# Altium PCB 新主控制.PcbDoc (part 2 of 3)
Units mil, origin at the board's own origin, x right, y up, seen from the top; angles counter-clockwise.
Board outline 9070 x 4900 mil, 2 copper layers (Top Layer, Bottom Layer); 275 components, 202 nets, 862 pads, 116 vias.
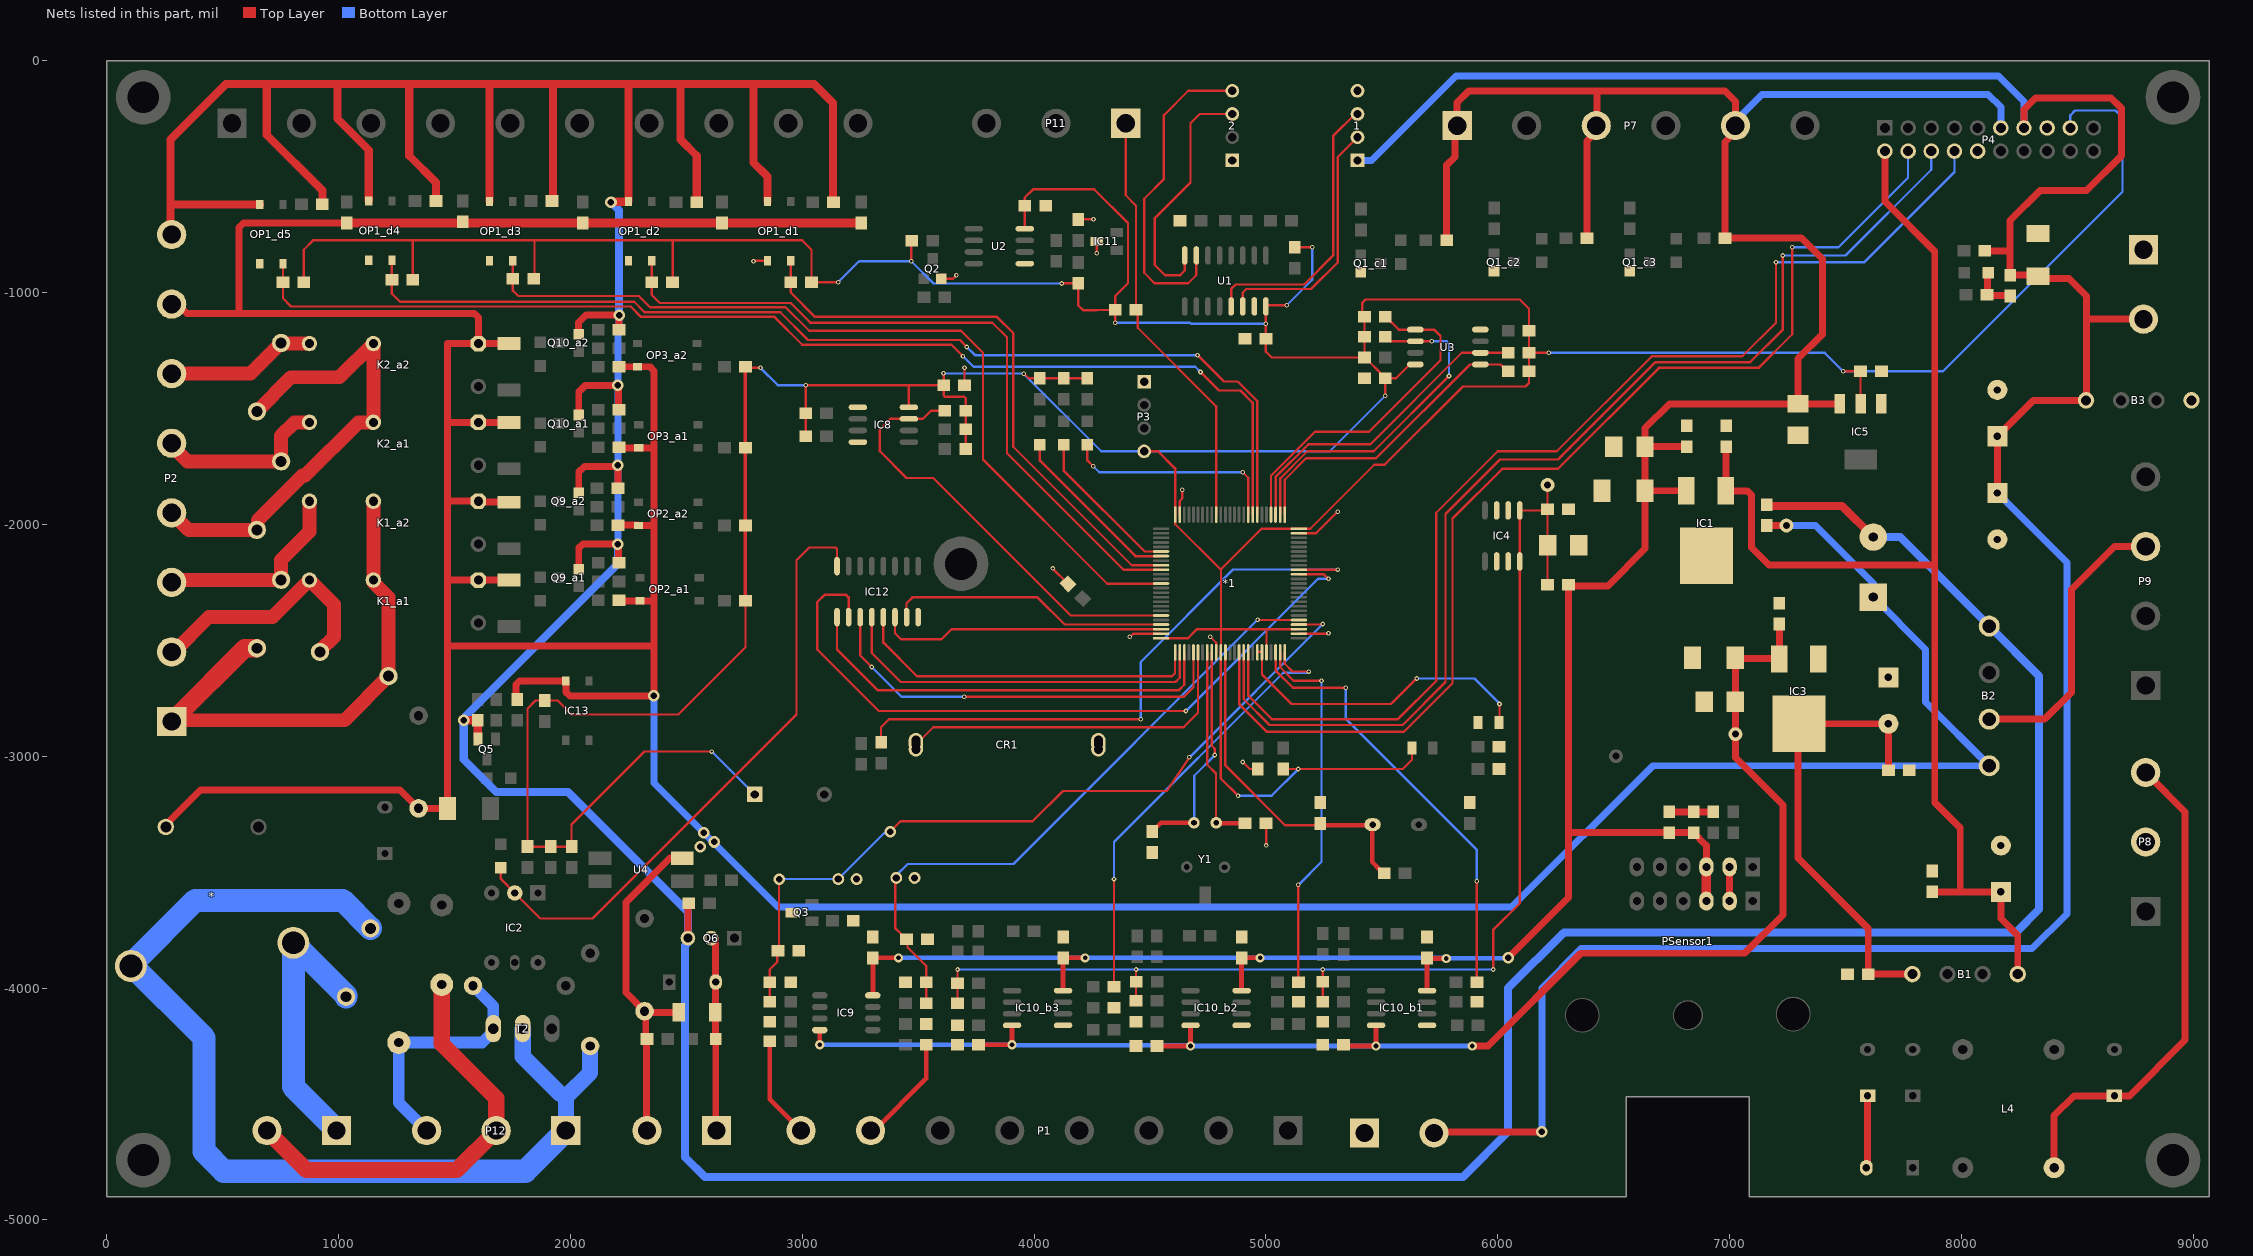
[diagram p2: the nets of this part, all layers, seen from the top]

## Part data (continued)
OP1_d1 OP1_d2 OP1_d3 OP1_d4 OP1_d5 OP3_a1 OP3_a2: library part OPTOISO1, "品牌： TOSHIBA(东芝)    型号： TLP781(GR-TP6,F)  输入电压类型：DC 输出通道数：1 正向电压：1.15V 反向电压：5V 输出电流：50mA 接收端电压：80V 集射极饱和电压(Vce(sat)@Ic,IF)：400mV@2.4mA,8mA 隔离电压(rms)：5kV OPTOISOLATR 5KV TRANSISTOR 工作温度:-55°C~110°C"
OP2_a1 OP2_a2: library part OPTOISO1, "Optoisolator  品牌： TOSHIBA(东芝)    型号： TLP781(GR-TP6,F)  输入电压类型：DC 输出通道数：1 正向电压：1.15V 反向电压：5V 输出电流：50mA 接收端电压：80V 集射极饱和电压(Vce(sat)@Ic,IF)：400mV@2.4mA,8mA 隔离电压(rms)：5kV OPTOISOLATR 5KV TRANSISTOR 工作温度:-55°C~110°C"
P1 P2: "DG141V-2.54-8", LatestRevisionDate=17-Jul-2002, LatestRevisionNote="Re-released for DXP Platform.", Publisher="Altium Limited"
P3: "品牌： XFCN(兴飞) 型号： PZ254V-11-04P  排数：单排 总PIN位数：4P 间距：2.54mm 插针结构：1x4P 安装类型：直插 圆针/方针：方针 额定电流：3A 额定电压：250V 配合针长度：6mm 塑高：2.5mm 端接针长度：3mm 工作温度范围：-40℃~+105℃ 颜色：黑色", LatestRevisionDate=17-Jul-2002, LatestRevisionNote="Re-released for DXP Platform.", Publisher="Altium Limited"
P4: "品牌： ZHOURI(洲日)   型号： DC3-2.54-20PAS  ：连接器类型：简牛座 间距：2.54mm 结构：2x10P 排数：2 每排PIN数：10 行距：2.54mm 封装形式：直插 额定电流：1.5A 工作温度范围：-40℃~+105℃ 简易牛角 2.54-2x10 ROHS 直插", LatestRevisionDate=17-Jul-2002, LatestRevisionNote="Re-released for DXP Platform.", Publisher="Altium Limited"
P5 P6 P13 P14: "DG141V-2.54-2P", LatestRevisionDate=17-Jul-2002, LatestRevisionNote="Re-released for DXP Platform.", Publisher="Altium Limited"
  P14: ComponentLink1Description="New link"
P7: "品牌： KEFA(科发)  KF7.62-6p隔板类型：两面 间距：7.62mm 结构：1x2P 每排PIN数：2 排数：1 安装方式：直针 引脚位置：边脚 额定电流：24A 额定电压：450V 线规 - AWG：12~22 线规 - mm2：2.5 工作温度范围：-40℃~+105℃ 颜色：黑色 黑色", LatestRevisionDate=17-Jul-2002, LatestRevisionNote="Re-released for DXP Platform.", Publisher="Altium Limited"
P8 P11 P12: "品牌： KEFA(科发)  KF7.62-3p隔板类型：两面 间距：7.62mm 结构：1x2P 每排PIN数：2 排数：1 安装方式：直针 引脚位置：边脚 额定电流：24A 额定电压：450V 线规 - AWG：12~22 线规 - mm2：2.5 工作温度范围：-40℃~+105℃ 颜色：黑色 黑色", LatestRevisionDate=17-Jul-2002, LatestRevisionNote="Re-released for DXP Platform.", Publisher="Altium Limited"
P9: "品牌： KEFA(科发)  KF7.62-4p隔板类型：两面 间距：7.62mm 结构：1x2P 每排PIN数：2 排数：1 安装方式：直针 引脚位置：边脚 额定电流：24A 额定电压：450V 线规 - AWG：12~22 线规 - mm2：2.5 工作温度范围：-40℃~+105℃ 颜色：黑色 黑色", LatestRevisionDate=17-Jul-2002, LatestRevisionNote="Re-released for DXP Platform.", Publisher="Altium Limited"
P10: "品牌： KEFA(科发)  KF7.62-10p隔板类型：两面 间距：7.62mm 结构：1x2P 每排PIN数：2 排数：1 安装方式：直针 引脚位置：边脚 额定电流：24A 额定电压：450V 线规 - AWG：12~22 线规 - mm2：2.5 工作温度范围：-40℃~+105℃ 颜色：黑色 黑色", LatestRevisionDate=17-Jul-2002, LatestRevisionNote="Re-released for DXP Platform.", Publisher="Altium Limited"
PSensor1: library part MPX
Q1_c1 Q1_c2 Q1_c3 Q2: library part 2N3904, "品牌： KEC  型号： 2N3904S-RTK/PS  晶体管类型：NPN 集射极击穿电压(Vceo)：40V 集电极电流(Ic)：200mA 功率(Pd)：350mW 直流电流增益(hFE@Ic,Vce)：100@10mA,1V NPN,Vceo=40V,Ic=200mA", ComponentLink1Description="Manufacturer Link", ComponentLink1URL=http://www.fairchildsemi.com/, ComponentLink2Description=Datasheet, ComponentLink2URL=http://www.fairchildsemi.com/ds/2N%2F2N3904.pdf, DatasheetVersion=1997, LatestRevisionDate=15-Jan-2003, LatestRevisionNote="PCB Footprint 'BCY-W3/D4.7' replaced", PackageDescription="TO, Flat Index; 3 In-Line, Axial Leads; Body Dia. 4.5mm; Leads 0.51 x 0.48 mm (max)", PackageReference=TO-92A, PackageVersion=Sep-1998, Published=8-Jun-2000, Publisher="Altium Limited"
Q3: library part SS8550_C7420371, Collector Current (Ic)=1.5A, Collector Cut-Off Current (Icbo)=100nA, Collector-Emitter Breakdown Voltage (Vceo)=25V, Collector-Emitter Saturation Voltage (VCE(sat)@Ic,Ib)=500mV@800mA,80mA, DC Current Gain (hFE@Ic,Vce)=120@100mA,1.0V, JLCPCB Part Class="Extended Part", LCSC Part Name="耐压:25V 电流:1.5A PNP H档 200-350", Manufacturer=宏迦橙, Operating Temperature=-55℃~+150℃, Power Dissipation (Pd)=300mW, Transition Frequency (fT)=100MHz, Add into BOM=yes, Convert to PCB=yes, Datasheet=https://atta.szlcsc.com/upload/public/pdf/source/20231222/5BDA6DBF3A79C59009F81F0EEE6F8969.pdf, Device=SS8550_C7420371, Manufacturer Part=SS8550, Supplier=LCSC, Supplier Footprint=SOT-23, Supplier Part=C7420371, Symbol=SS8550_C7420371, Transistor Type=PNP
Q5: library part NPN, "NPN Transistor"
Q6: library part 2N3904, "NPN General Purpose Amplifier", ComponentLink1Description="Manufacturer Link", ComponentLink1URL=http://www.fairchildsemi.com/, ComponentLink2Description=Datasheet, ComponentLink2URL=http://www.fairchildsemi.com/ds/2N%2F2N3904.pdf, DatasheetVersion=1997, LatestRevisionDate=15-Jan-2003, LatestRevisionNote="PCB Footprint 'BCY-W3/D4.7' replaced", PackageDescription="TO, Flat Index; 3 In-Line, Axial Leads; Body Dia. 4.5mm; Leads 0.51 x 0.48 mm (max)", PackageReference=TO-92A, PackageVersion=Sep-1998, Published=8-Jun-2000, Publisher="Altium Limited"
Q9_a1 Q9_a2 Q10_a1 Q10_a2: library part 8050, "品牌： KEC   型号： 2N3904S-RTK/PS 晶体管类型：NPN 集射极击穿电压(Vceo)：40V 集电极电流(Ic)：200mA 功率(Pd)：350mW 直流电流增益(hFE@Ic,Vce)：100@10mA,1V NPN,Vceo=40V,Ic=200mA"
R1 R8 R49 R81 R82 R83 R84 R85: "Resistor", LatestRevisionDate=17-Jul-2002, LatestRevisionNote="Re-released for DXP Platform.", PackageDescription="Axial Device, Thru-Hole; 2 Leads; 0.4 in Pin Spacing", PackageReference=AXIAL-0.4, Published=8-Jun-2000, Publisher="Altium Limited"
R2: library part RES4, "品牌： UNI-ROYAL(厚声)  型号： 0805W8F1004T5E  电阻类型：厚膜电阻 阻值：1MΩ 精度：±1% 功率：125mW 温度系数：±100ppm/℃"
R3: library part RES1, "品牌： UNI-ROYAL(厚声)  品牌： UNI-ROYAL(厚声)  电阻类型：厚膜电阻 阻值：100kΩ 精度：±1% 功率：125mW 温度系数：±100ppm/℃"
R4: library part RES4, "品牌： UNI-ROYAL(厚声) 型号： 0805W8F1002T5E 电阻类型：厚膜电阻 阻值：10kΩ 精度：±1% 功率：125mW 温度系数：±100ppm/℃"
R5: library part RES2, "品牌： UNI-ROYAL(厚声) 型号： 0805W8J0221T5E 电阻类型：厚膜电阻 阻值：220Ω 精度：±5% 功率：125mW 温度系数：±100ppm/℃"
R6 R31_d1 R31_d2 R31_d3 R31_d4 R31_d5 R32 R36: library part RES1, "品牌： UNI-ROYAL(厚声) 型号： 0805W8F1002T5E 电阻类型：厚膜电阻 阻值：10kΩ 精度：±1% 功率：125mW 温度系数：±100ppm/℃"
R7 R28_c1 R28_c2 R28_c3 R34 R35: library part Res2, "品牌： UNI-ROYAL(厚声) 型号： 0805W8F1002T5E 电阻类型：厚膜电阻 阻值：10kΩ 精度：±1% 功率：125mW 温度系数：±100ppm/℃", LatestRevisionDate=17-Jul-2002, LatestRevisionNote="Re-released for DXP Platform.", PackageDescription="Axial Device, Thru-Hole; 2 Leads; 0.4 in Pin Spacing", PackageReference=AXIAL-0.4, Published=8-Jun-2000, Publisher="Altium Limited"
R9 R10 R11 R12 R13: library part RES2, "品牌： UNI-ROYAL(厚声) 型号： 0805W8F1002T5E 电阻类型：厚膜电阻 阻值：10kΩ 精度：±1% 功率：125mW 温度系数：±100ppm/℃"
R14 R15 R16: library part RES1, "品牌： UNI-ROYAL(厚声)    型号： 0805W8F3000T5E    电阻类型：厚膜电阻 阻值：300Ω 精度：±1% 功率：125mW 温度系数：±100ppm/℃"
R17 R18 R19 R20 R33 R50 R52: library part RES1, "品牌： UNI-ROYAL(厚声) 型号： 0805W8F1001T5E 电阻类型：厚膜电阻 阻值：1kΩ 精度：±1% 功率：125mW 温度系数：±100ppm/℃"
R21_b1 R21_b2 R21_b3: library part Res2, "品牌： Sunway(信维通信)   型号： SC0805J1005F4ANRH   阻值：10MΩ 精度：±5% 功率：125mW 温度系数：±100ppm/℃ 贴片厚膜电阻：体积0805_精度：±5% 阻值10M", LatestRevisionDate=17-Jul-2002, LatestRevisionNote="Re-released for DXP Platform.", PackageDescription="Axial Device, Thru-Hole; 2 Leads; 0.4 in Pin Spacing", PackageReference=AXIAL-0.4, Published=8-Jun-2000, Publisher="Altium Limited"
R22_b1 R22_b2 R22_b3: library part Res2, "品牌： UNI-ROYAL(厚声)  型号： 0805W8F1302T5E  电阻类型：厚膜电阻 阻值：13kΩ 精度：±1% 功率：125mW 温度系数：±100ppm/℃", LatestRevisionDate=17-Jul-2002, LatestRevisionNote="Re-released for DXP Platform.", PackageDescription="Axial Device, Thru-Hole; 2 Leads; 0.4 in Pin Spacing", PackageReference=AXIAL-0.4, Published=8-Jun-2000, Publisher="Altium Limited"
R23_b1 R23_b2 R23_b3 R26_b1 R26_b2 R26_b3 R27_b1 R27_b2 R27_b3 R29_c1 R29_c2 R29_c3: library part Res2, "品牌： UNI-ROYAL(厚声) 型号： 0805W8F1001T5E 电阻类型：厚膜电阻 阻值：1kΩ 精度：±1% 功率：125mW 温度系数：±100ppm/℃", LatestRevisionDate=17-Jul-2002, LatestRevisionNote="Re-released for DXP Platform.", PackageDescription="Axial Device, Thru-Hole; 2 Leads; 0.4 in Pin Spacing", PackageReference=AXIAL-0.4, Published=8-Jun-2000, Publisher="Altium Limited"
R24_b1 R24_b2 R24_b3 R25_b1 R25_b2 R25_b3 R86_a1 R86_a2 R91_a1 R91_a2: library part Res2, "品牌： UNI-ROYAL(厚声) 型号： 0805W8F4701T5E 电阻类型：厚膜电阻 阻值：4.7kΩ 精度：±1% 功率：125mW 温度系数：±100ppm/℃", LatestRevisionDate=17-Jul-2002, LatestRevisionNote="Re-released for DXP Platform.", PackageDescription="Axial Device, Thru-Hole; 2 Leads; 0.4 in Pin Spacing", PackageReference=AXIAL-0.4, Published=8-Jun-2000, Publisher="Altium Limited"
R30_d1 R30_d2 R30_d3 R30_d4 R30_d5 R51_d1 R51_d2 R51_d3 R51_d4 R51_d5: library part RES1, "电阻类型：厚膜电阻 阻值：4.7kΩ 精度：±1% 功率：125mW 温度系数：±100ppm/℃"
R37 R87_a1 R87_a2 R92_a1 R92_a2: Allowable Voltage (AC)=300V, Allowable Voltage (DC)=385V, Clamping Voltage=775V, JLCPCB Part Class="Extended Part", LCSC Part Name="钳位电压775V 67焦耳 插件压敏电阻", Manufacturer=Dersonic(德尔创), Peak Current=2.5kA, Varistor Voltage=470V, Add into BOM=yes, Convert to PCB=yes, Datasheet=https://atta.szlcsc.com/upload/public/pdf/source/20220216/7E2B8E32815A179BCD41409596CBB68C.pdf, Device=RM10D471KD14E100, Manufacturer Part=RM10D471KD14E100, Maximum Energy=67J, Rated Wattage=400mW, Supplier=LCSC, Supplier Footprint=插件,P=7.5mm, Supplier Part=C2974809, Symbol=RM10D471KD14E100, Typical Capatitance=210pF@1kHz
R38: library part RES2, "品牌： UNI-ROYAL(厚声) 型号： MFR0W4F3600A50电阻类型：金属膜电阻 阻值：360Ω 精度：±1% 功率：250mW 温度系数：±50ppm/℃ 铜脚，圆柱状直插 1/4W", Manufacturer="Generic Components", Class=Passive, Published=08/06/2000, Publisher="Altium Hobart Technology Centre", SubClass=Resistor
R39: library part RES2, "品牌： UNI-ROYAL(厚声) 型号： 0805W8F1500T5E ：电阻类型：厚膜电阻 阻值：150Ω 精度：±1% 功率：125mW 温度系数：±100ppm/℃", Manufacturer="Generic Components", Class=Passive, Published=08/06/2000, Publisher="Altium Hobart Technology Centre", SubClass=Resistor
R40 R42 R43 R44 R45 R46 R47: library part RES2, "品牌： UNI-ROYAL(厚声) 型号： 0805W8F3301T5E  电阻类型：厚膜电阻 阻值：3.3kΩ 精度：±1% 功率：125mW 温度系数：±100ppm/℃", Manufacturer="Generic Components", Class=Passive, Published=08/06/2000, Publisher="Altium Hobart Technology Centre", SubClass=Resistor
R41: library part RES2, "品牌： UNI-ROYAL(厚声) 型号： MFR0W4F3300A50 电阻类型：金属膜电阻 阻值：330Ω 精度：±1% 功率：250mW 温度系数：±50ppm/℃ 铜脚，圆柱状直插 1/4W", Manufacturer="Generic Components", Class=Passive, Published=08/06/2000, Publisher="Altium Hobart Technology Centre", SubClass=Resistor
R48: "Resistor", Manufacturer="Generic Components", Class=Passive, Published=08/06/2000, Publisher="Altium Hobart Technology Centre", SubClass=Resistor
R56: library part RES2
R57: library part RES2, "品牌： 华星机电 型号： MF2WS-20Ω±1%T 电阻类型：金属膜电阻 阻值：20Ω 精度：±1% 功率：2W 温度系数：±200ppm/℃", Manufacturer="Generic Components", Class=Passive, Published=08/06/2000, Publisher="Altium Hobart Technology Centre", SubClass=Resistor
R59 R61 R63 R80: library part RES2, "Resistor", Manufacturer="Generic Components", Class=Passive, Published=08/06/2000, Publisher="Altium Hobart Technology Centre", SubClass=Resistor
R88_a1 R88_a2 R93_a1 R93_a2: library part RES1, "品牌： UNI-ROYAL(厚声) 型号： 0805W8J0221T5E 电阻类型：厚膜电阻 阻值：220Ω 精度：±5% 功率：125mW 温度系数：±100ppm/℃"
R89_a1 R89_a2 R90_a1 R90_a2 R94_a1 R94_a2 R95_a1 R95_a2: library part RES1, "品牌： UNI-ROYAL(厚声) 型号： 0805W8F4701T5E 电阻类型：厚膜电阻 阻值：4.7kΩ 精度：±1% 功率：125mW 温度系数：±100ppm/℃"
T2: library part Triac, "品牌：FUXINSEMI(富芯森美) 型号： BT139-600E", Manufacturer="Generic Components", Class=Discrete, Note="Pin 2 is electrically connected to Pin 4 (TAB)", Published=29/09/2000, SubClass=TRIAC
TP_1 TP_VRef1 TP_VSS1 YL1: library part TP
U1: library part MAX232, "品牌： UMW(友台半导体)   型号： MAX3232ESE   类型：收发器 驱动器/接收器：2/2 数据速率：250Kbps"
U2: library part MAX485, "品牌： ADI(亚德诺)/MAXIM(美信)   型号： MAX3485EESA+T  类型：收发器 驱动器/接收器：1/1 数据速率：12Mbps"
U3: "品牌： WINBOND(华邦)   型号： W25Q64JVSSIM"
Y1: library part XTAL-2, "品牌： YXC(扬兴晶振)  型号： X308032768KGB2SC 频率：32.768kHz 频率公差：±10ppm 负载电容：12.5pF YT-38 温飘系数: -0.04x 10^(-6)/℃2"
Y2: library part XTAL-1, "品牌： YXC(扬兴晶振)  型号： X49SD8MSD2SC   频率：8MHz 频率公差：±20ppm 负载电容：20pF 频率： 8MHz 负载： 20pF 频率公差： ±20ppm 工作温度： -20~70℃"

## Free pads (board coordinates)
  round 236.22 hole 137.8: ""(157.48,-157.48) ""(157.48,-4742.52) ""(3685,-2170) ""(8912.52,-157.48) ""(8912.52,-4742.52)

## Via types
v1: diameter 20, hole 10, Top Layer to Bottom Layer, 92 vias
v2: diameter 50, hole 28, Top Layer to Bottom Layer, 15 vias
v3: diameter 40, hole 20, Top Layer to Bottom Layer, 9 vias

## Nets (pads, with @x,y where several pads share a name; then routed paths per layer and width w, separated by ;. In a path a pad name is that pad's centre, name@x,y a point inside that pad or via, vN(x,y) a via of type N, cw(c..) or ccw(c..) an arc to the next point about the centre after c; other vN are vias at no path point)
+2.5Vref: C8.2 E1.1 IC4.1 IC4.8 R5.1 R23_b1.1 R23_b2.1 R23_b3.1 R26_b1.1 R26_b2.1 R26_b3.1 TP_VRef1.1 | length 5317.5
  Top Layer w10: R26_b3.1@3670,-4065 R23_b3.1@3670,-3980 v1(3670,-3920) ; R26_b2.1@4440,-4055 4440,-3975 4440.9,-3974.1 4440,-3973.19 v1(4440,-3920) ; R26_b1.1@5245,-4060 R23_b1.1@5245,-3972.88 v1(5245,-3920) ; v1(5980,-3920) 5980,-3750 6095,-3635 IC4.8@6095,-2160 IC4.1@6095,-1940 6210,-1940 C8.2@6215,-1935 ; R5.1@6215,-2260 E1.1@6215,-2090 6215,-1940 C8.2@6215,-1935 ; TP_VRef1.1@6215,-1830 6210,-1830 6215,-1835 C8.2@6215,-1935
  Bottom Layer w10: v1(3670,-3920) v1(5245,-3920) v1(5980,-3920)
+3.3V: *1.11 *1.21 *1.28 *1.50 *1.75 *1.100 C14.1 C19.1 C27.2 C37.2 C38.2 C40.2 FM1.2 IC5.2 IC8.8 L1.1 P3.4 P4.17 R4.2 R6.1 R9.1 R10.1 R11.1 R12.1 R13.1 R14.1 R15.1 R16.1 R31_d1.1 R31_d2.1 R31_d3.1 R31_d4.1 R31_d5.1 R34.2 R36.2 R39.1 R40.2 R42.2 R43.2 R44.1 R45.1 R46.1 R47.2 R61.1 R82.1 R88_a1.1 R88_a2.1 R93_a1.1 R93_a2.1 U1.16 U2.8 U3.8 | length 26111.2
  Top Layer w10: R31_d5.1@850,-955 850,-815 890,-775 1320,-775 ; R31_d4.1@1320,-945 1320,-775 ; R31_d3.1@1841.63,-955 1845,-951.63 1845,-775 ; R31_d2.1@2440.81,-955 2440.81,-775.81 2440,-775 ; v1(2610,-2980) 2320,-2980 2005,-3295 R82.1@2005,-3390 R39.1@1915,-3390 R40.2@1815,-3390 1815,-2795 1850,-2760 R61.1@1890,-2760 1945,-2760 2005,-2820 2465,-2820 2755,-2530 R88_a1.1@2755,-2330 ; R93_a2.1@2755,-1320 2760,-1325 v1(2820,-1325) ; R9.1@3015,-1620 R10.1@3015,-1520 v1(3015,-1400) 3460,-1400 ; v1(3155,-955) R31_d1.1@3040,-955 3040,-815 3000,-775 2440,-775 ; IC8.8@3460,-1495 3460,-1400 ; v1(3470,-865) 3470,-778.86 R34.2@3472.78,-776.08 ; v1(3609.05,-1348.67) 3610,-1349.62 C27.2@3610,-1400 ; R13.1@3705,-1675 R12.1@3705,-1590 R11.1@3705,-1510 3705,-1455.86 3699.14,-1450 3615.9,-1450 3610,-1444.1 C27.2@3610,-1400 ; v1(3955,-1350) 3957.43,-1350 3977.43,-1370 R15.1@4025,-1370 R14.1@4127.5,-1370 R16.1@4230,-1370 ; U2.8@3960,-725 C40.2@3960,-625 3959.14,-624.14 3959.14,-590.86 3995,-555 4260,-555 4405,-700 4405,-960 4350,-1015 R6.1@4350,-1075 ; v1(4118.97,-960.98) 4119.95,-960 R36.2@4190,-960 4190,-1055 4210.86,-1075.86 4268.72,-1075.86 4269.58,-1075 R6.1@4350,-1075 ; v1(4350,-1130) R6.1@4350,-1075 ; P3.4@4475,-1685 4535,-1685 4608.43,-1758.43 4608.43,-1957.41 *1.75@4608.78,-1957.76 4609.13,-1958.1 4609.13,-1999.13 4805,-2195 4806.33,-2193.67 ; *1.100@4547.76,-2491.22 4548.1,-2490.87 4664.13,-2490.87 4703.15,-2451.85 4806.33,-2451.85 ; *1.11@4805.28,-2551.33 4805.98,-2550.64 4805.98,-2521.09 4806.33,-2520.74 4806.33,-2451.85 ; *1.11@4805.63,-2552.24 4805.63,-3095.63 v1(4880,-3170) ; *1.21@5002.48,-2552.24 5002.48,-2547.48 5001.7,-2546.7 5001.7,-2545 5002.48,-2544.22 5002.48,-2451.85 ; R4.2@5075,-3055 v1(5140,-3055) 5590,-3055 5630,-3015 L1.1@5630,-2965 ; v1(5090,-1055) 5005,-1055 U1.16@5000,-1060 v1(5000,-1135) 5000,-1255 5025,-1280 R44.1@5425,-1280 ; C37.2@5125,-805 v1(5200,-805) ; *1.28@5142.24,-2451.85 5002.48,-2451.85 ; R46.1@5425,-1110 R47.2@5425,-1190 R44.1@5425,-1280 ; R46.1@5425,-1105 5415,-1095 5415,-1045 5430,-1030 6095,-1030 6135,-1070 R45.1@6135,-1165 R43.2@6135,-1330 ; v1(5515,-1445) 5515,-1372.56 5492.44,-1350 5492.44,-1344.88 5437.56,-1290 5435,-1290 R44.1@5425,-1280 ; C14.1@5515,-1370 5561.54,-1370 5616.54,-1315 5630,-1315 5635,-1310 U3.8@5644.61,-1310 ; R43.2@6135,-1340 6135,-1390 6120,-1405 5850,-1405 5512,-1743 5467,-1743 5191.22,-2018.78 *1.50@5142.24,-2018.78 4981.22,-2018.78 4806.33,-2193.67 ; R42.2@6135,-1260 v1(6220,-1260) ; v1(7490,-1340) C19.1@7565,-1340 IC5.2@7565,-1480 IC5.2@7570,-1475 ; P4.17@8470,-290 P4.17@8480,-280 ; 1320,-775 1375,-775 1845,-775 ; 1845,-775 2440,-775 ; 3460,-1400 C27.2@3610,-1400 ; 4806.33,-2451.85 5002.48,-2451.85 ; 4806.33,-2451.85 4806.33,-2193.67
  Top Layer w15: R88_a1.1@2755,-2330 R88_a2.1@2755,-2005 R93_a1.1@2755,-1670 R93_a2.1@2755,-1320
  Bottom Layer w10: v1(2610,-2980) FM1.2@2795,-3165 ; v1(2820,-1325) 2895,-1400 v1(3015,-1400) ; v1(3155,-955) 3245,-865 v1(3470,-865) 3565.98,-960.98 v1(4118.97,-960.98) ; v1(3609.05,-1348.67) 3609.72,-1349.34 3954.34,-1349.34 v1(3955,-1350) 4290,-1685 P3.4@4475,-1685 5275,-1685 v1(5515,-1445) ; v1(4350,-1130) 4671.54,-1130 4676.54,-1135 v1(5000,-1135) ; v1(4880,-3170) 5025,-3170 v1(5140,-3055) ; v1(5090,-1055) 5200,-945 v1(5200,-805) ; v1(6220,-1260) 7410,-1260 v1(7490,-1340) 7920,-1340 8695,-565 8695,-245 8665,-215 8490,-215 8470,-235 P4.17@8470,-290
+5VSS: C11.1 C30.2 C35_b1.2 C35_b2.2 C35_b3.2 C43.1 C45.2 D1.2 E2.1 E4.1 IC1.3 IC5.3 IC9.8 IC10_b1.8 IC10_b2.8 IC10_b3.8 P4.11 P7.1 P7.3 P7.5 PSensor1.3 R5.2 R28_c1.2 R28_c2.2 R28_c3.2 | length 13950.6
  Top Layer w20: IC9.8@3304.17,-4031.58 3305,-4030.75 C30.2@3305,-3870 v3(3415,-3870) ; IC10_b3.8@4120,-4010 4124.03,-4010 4125,-4009.03 C35_b3.2@4125,-3870 v3(4220,-3870) ; IC10_b2.8@4895,-4010.88 C35_b2.2@4895,-3870 v3(4975,-3870) ; IC10_b1.8@5695,-4010.88 C35_b1.2@5695,-3870 5697.5,-3872.5 v3(5777.5,-3872.5)
  Top Layer w30: R28_c1.2@5779.95,-774.93 5779.95,-450.05 5815,-415 5815,-290 P7.1@5825,-280 5825,-180 5875,-130 6427.5,-130 ; v2(6045,-3870) 6305,-3610 6305,-3330 ; R28_c2.2@6385,-766.39 6385,-345.57 6425,-305.57 P7.3@6425,-280 6427.5,-282.5 6427.5,-130 ; D1.2@6635.87,-1855.87 6635.87,-2104.13 6475,-2265 6310,-2265 R5.2@6305,-2260 6305,-3330 ; IC1.3@6813.39,-1855.47 6812.91,-1855 D1.2@6635,-1855 E2.1@6635,-1665 ; C11.1@6815,-1665 E2.1@6635,-1665 ; PSensor1.3@6900,-3477.13 6900,-3385.09 6882,-3367.09 6882,-3367 6857.56,-3342.56 6855,-3342.56 6845,-3332.56 C43.1@6845,-3330 C45.2@6740,-3330 6305,-3330 ; P7.5@7025,-290 7025,-175 6980,-130 6427.5,-130 ; P7.5@7025,-280 7025,-305.98 6980,-350.98 R28_c3.2@6980,-765 6992.56,-765 7310,-765 7400,-855 7400,-1180 7295,-1285 E4.1@7295,-1480 ; IC5.3@7475,-1480 E4.1@7295,-1480 ; E2.1@6635,-1665 6635,-1585 6740,-1480 E4.1@7295,-1480
  Top Layer w40: PSensor1.3@6900,-3625 PSensor1.3@6900,-3477.13
  Bottom Layer w20: v3(3415,-3870) v3(4220,-3870) v3(4975,-3870) 5775,-3870 v3(5777.5,-3872.5) 5778.75,-3871.25 6043.75,-3871.25 v2(6045,-3870)
  Bottom Layer w30: P7.1@5825,-280 5825,-265 P7.1@5845,-245 ; P7.5@7025,-280 7025,-260 7140,-145 8115,-145 8170,-200 P4.11@8170,-290
+12V: B1.1 C9.1 C16.1 E5.1 IC1.1 P4.2 | length 5369
  Top Layer w30: C9.1@6985,-1665 6983.84,-1666.16 6983.84,-1854.31 IC1.1@6982.68,-1855.47 7077.43,-1855.47 7095,-1873.05 7095,-2100 7170,-2175 7885,-2175 ; P4.2@7670,-390 7670,-607.5 7885,-822.5 7885,-2175 ; C16.1@7875,-3585 7995,-3585 ; B1.1@8243.15,-3940 8243.15,-3773.15 8170,-3700 E5.1@8170,-3585 7995,-3585 ; 7885,-2175 7885,-3200 7995,-3310 7995,-3585
+24V: 1.1 B3.1 C23.1 D7.2 E6.1 E9.1 P4.13 P13.2 P14.2 R7.2 | length 12070.5
  Top Layer w30: P14.2@5725,-4625 5725,-4635 5740,-4620 v2(6190,-4620) ; R7.2@8100.9,-820 8210,-820 ; E6.1@8160,-1870 E6.1@8155,-1865 E9.1@8155,-1620 8310,-1465 B3.1@8537.64,-1465 8540,-1462.64 8540,-1115 ; C23.1@8210,-925 8210,-820 ; C23.1@8220,-925 D7.2@8330,-925 ; P4.13@8270,-290 8270,-210 8320,-160 8645,-160 8690,-205 8690,-410 8540,-560 8340,-560 8210,-690 8210,-820 ; D7.2@8330,-930 8340,-940 8465,-940 8540,-1015 8540,-1115 ; P13.2@8785,-1115 8785,-1110 8780,-1105 8770,-1115 8540,-1115
  Bottom Layer w30: 1.1@5395,-430 5455,-430 5820,-65 8160,-65 8270,-175 P4.13@8270,-290 ; v2(6190,-4620) 6190,-4000 6360,-3830 8305,-3830 8455,-3680 8455,-2165 E6.1@8155,-1865
+24VDD: *.2 B2.1 C22.1 D14.2 D16.2 D25_a1.2 D25_a2.2 D27_a1.2 D27_a2.2 E8.1 IC13.4 K1_a1.1 K1_a2.1 K2_a1.1 K2_a2.1 OP2_a1.4 OP2_a2.4 OP3_a1.4 OP3_a2.4 P2.7 P6.2 R30_d1.1 R30_d2.1 R30_d3.1 R30_d4.1 R30_d5.1 R56.2 R59.2 R81.2 R83.1 R86_a1.1 R86_a2.1 R91_a1.1 R91_a2.1 TP_1.1 U4.4 | length 22204.7
  Top Layer w30: *.2@255,-3310 255,-3295 405,-3145 1265,-3145 R56.2@1345,-3225 D14.2@1470,-3225 1470,-2525 ; P2.7@280,-1050 305.57,-1050 345.57,-1090 570,-1090 ; R30_d5.1@1035,-700 590,-700 570,-720 570,-1090 ; D25_a1.2@1735,-2240 K1_a1.1@1602.76,-2240 1470,-2240 ; D25_a2.2@1735,-1905 1732.5,-1902.5 1617.5,-1902.5 1615,-1900 K1_a2.1@1602.76,-1900 1470,-1900 ; D27_a1.2@1735,-1560 K2_a1.1@1602.76,-1560 1470,-1560 ; D27_a2.2@1735,-1220 K2_a2.1@1602.76,-1220 ; R59.2@1770,-2755 1765,-2750 1765,-2690 1780,-2675 IC13.4@1980,-2675 1980,-2722.43 1997.57,-2740 v2(2360,-2740) 2360,-2525 ; R86_a2.1@2205,-2003.61 2288.77,-2003.61 2290.16,-2005 OP2_a2.4@2294.09,-2005 2360,-2005 ; R91_a1.1@2210,-1667.28 2222.28,-1667.28 2225,-1670 OP3_a1.4@2295,-1670 2358.71,-1670 2360,-1671.29 ; R91_a2.1@2210,-1320 OP3_a2.4@2290,-1320 2342.43,-1320 2360,-1337.57 2360,-1671.29 ; R86_a1.1@2212.05,-2330 OP2_a1.4@2300,-2330 2360,-2330 ; P6.2@2327.5,-4615 2327.5,-4222.5 R83.1@2330,-4220 2325,-4215 R81.2@2325,-4105 ; D16.2@2467.52,-4104.85 2467.37,-4105 R81.2@2325,-4105 ; U4.4@2482.17,-3440 2430,-3440 2240,-3630 2240,-4020 R81.2@2320,-4100 R81.2@2325,-4105 ; C22.1@7160,-2005 TP_1.1@7245,-2005 ; B2.1@8118.08,-3039.26 B2.1@8120,-3041.18 ; 570,-1090 1585.18,-1090 1602.76,-1107.57 K2_a2.1@1602.76,-1220 ; 1470,-2525 2360,-2525 ; 1470,-2525 1470,-2240 ; 1470,-2240 1470,-1900 ; 1470,-1900 1470,-1560 ; 1470,-1560 1470,-1220 K2_a2.1@1602.76,-1220 ; 2360,-2525 2360,-2330 ; 2360,-2330 2360,-2005 ; 2360,-2005 2360,-1671.29
  Top Layer w40: R30_d5.1@1030,-700 1530,-700 R30_d4.1@1535,-695 ; R30_d4.1@1535,-700 R30_d3.1@2052.5,-700 R30_d2.1@2653.75,-700 R30_d1.1@3255,-700
  Bottom Layer w30: v2(2360,-2740) 2360,-3115 2895,-3650 6060,-3650 6668.82,-3041.18 B2.1@8120,-3041.18 7845,-2766.18 7845,-2539.05 E8.1@7620,-2314.05 7620,-2255 7370,-2005 TP_1.1@7245,-2005
  other v2: 2560,-3390 2620,-3370 2575,-3330
-5VSS: C13.1 C34_b1.2 C34_b2.2 C34_b3.2 D2.1 E3.2 IC3.3 IC9.4 IC10_b1.4 IC10_b2.4 IC10_b3.4 TP_VSS1.1 | length 6694.9
  Top Layer w20: v3(3075,-4245) 3075.41,-4244.59 3075.41,-4181.99 IC9.4@3075.83,-4181.57 ; C34_b3.2@3760,-4245 v3(3905,-4245) IC10_b3.4@3905,-4160.88 ; C34_b2.2@4530,-4250 v3(4675,-4250) IC10_b2.4@4675,-4160.88 ; C34_b1.2@5335,-4245 5340,-4250 v3(5475,-4250) IC10_b1.4@5475,-4160.88
  Top Layer w30: v3(5890,-4250) 5957.99,-4250 6357.99,-3850 7065,-3850 7230,-3685 7230,-3210 7025,-3005 TP_VSS1.1@7025,-2905 E3.2@7025,-2765 D2.1@7025,-2575 7028.42,-2578.42 7215.44,-2578.42 7215.44,-2429.56 7217.5,-2427.5 C13.1@7212.5,-2422.5
  Bottom Layer w20: v3(3075,-4245) v3(3905,-4245) 3907.5,-4247.5 4672.5,-4247.5 v3(4675,-4250) v3(5475,-4250) v3(5890,-4250)
-12V: B1.4 C10.1 C21.2 E7.2 IC3.2 | length 2014.7
  Top Layer w30: C21.2@7672.44,-3070 7682.44,-3060 C21.2@7685,-3060 E7.2@7685,-2860 7675,-2860 7670,-2865 7665,-2860 7295,-2860 7295,-3440 7598.11,-3743.11 C10.1@7598.11,-3940 B1.4@7788.43,-3940 B1.4@7796.41,-3940
AC_9V: C17.1 L4.2 P8.3 | length 2155.9
  Top Layer w30: L4.2@8400,-4775 8400,-4550 8485,-4465 C17.1@8660,-4465 8725,-4465 8965,-4225 8965,-3240 8805,-3080 8805,-3070 P8.3@8795,-3070
AC_17V: B2.2 P9.3 | length 1247.9
  Top Layer w30: B2.2@8120,-2840.39 8359.61,-2840.39 8475,-2725 8475,-2281.14 8661.14,-2095 8780,-2095 8785,-2100 8790,-2095 P9.3@8795,-2095
AC_FS: P12.3 R41.2 R57.2 T2.1 | length 1144.5
  Top Layer w50: P12.3@1345,-4600 1360,-4615 P12.3@1380,-4615 P12.3@1390,-4605
  Top Layer w70: R57.2@1260,-4235 R57.2@1265,-4240 ; R41.2@1580,-3992.71 R41.2@1580,-3990
  Bottom Layer w50: P12.3@1380,-4615 1260,-4495 R57.2@1260,-4235 1619.25,-4235 T2.1@1668,-4186.25 ; R41.2@1580,-3990 1668,-4078 T2.1@1668,-4175
AC_YSJ: *.4 P5.1 R37.1 | length 1214.1
  Bottom Layer w70: P5.1@980,-4600 991.32,-4611.32 P5.1@991.32,-4615
  Bottom Layer w100: P5.1@980,-4600 805,-4425 *.4@805,-3805 1032.64,-4032.64 R37.1@1032.64,-4037.64
ADC1: *1.23 R25_b1.2 | length 1916.3
  Top Layer w10: *1.23@5041.85,-2552.24 5041.85,-2630.48 5116.37,-2705 v1(5345,-2705) ; R25_b1.2@5910,-3975 v1(5910,-3540)
  Bottom Layer w10: v1(5345,-2705) 5345,-2840 5910,-3405 v1(5910,-3540)
ADC2: *1.24 R25_b2.2 | length 1609.1
  Top Layer w10: *1.24@5061.54,-2552.24 5061.54,-2559.16 5062.37,-2560 5061.54,-2560.84 5061.54,-2616.54 5120,-2675 v1(5240,-2675) ; R25_b2.2@5140,-3975 v1(5140,-3555)
  Bottom Layer w10: v1(5140,-3555) 5240,-3455 v1(5240,-2675)
ADC3: *1.25 R25_b3.2 | length 1936.2
  Top Layer w10: R25_b3.2@4345,-3995 v1(4345,-3530) ; *1.25@5081.22,-2552.24 5081.22,-2601.22 5115,-2635 v1(5185,-2635)
  Bottom Layer w10: v1(4345,-3530) 4345,-3370 5075,-2640 5177.29,-2640 5182.29,-2635 v1(5185,-2635)
ADC_Sense: P1.7 R20.2 | length 478.2
  Top Layer w20: P1.7@3295,-4615 3310,-4615 3535,-4390 R20.2@3535,-4245
AGND: *1.19 *1.20 B3.4 C6.1 C7.2 C8.1 C9.2 C10.2 C11.2 C12.2 C13.2 C16.2 C21.1 C23.2 C24.2 C28.2 C29.2 C30.1 C31.2 C32.2 C34_b1.1 C34_b2.1 C34_b3.1 C35_b1.1 C35_b2.1 C35_b3.1 C36_b1.1 C36_b2.1 C36_b3.1 C43.2 C45.1 D1.1 D2.2 D6.2 D7.1 E1.2 E2.2 E3.1 E5.2 E6.2 E7.1 E9.2 E10.2 E11.2 IC1.2 IC3.1 IC4.2 IC4.3 IC4.6 IC4.7 IC10_b1.5 IC10_b2.5 IC10_b3.5 L2.2 P8.2 P13.1 P14.1 PSensor1.2 Q3.3 R27_b1.2 R27_b2.2 R27_b3.2 R49.2 R50.1 R52.1 | length 1913.5
  Top Layer w10: *1.19@4963.11,-2552.24 4963.11,-2551.89 4965,-2550 4981.96,-2550 4982.8,-2550.84 *1.20@4982.8,-2552.24 4982.8,-2647.8 5110,-2775 5540,-2775 v1(5650,-2665) ; L2.2@6005,-2855 6007.55,-2852.45 v1(6007.55,-2775.09)
  Top Layer w30: C45.1@6740,-3240 C43.2@6845,-3240 ; C43.2@6845.22,-3239.78 6929.78,-3239.78 C12.2@6930,-3239.57 ; PSensor1.2@7000,-3625 PSensor1.2@7000,-3477.13 ; C24.2@8110,-1010 8110,-1015 8112.5,-1012.5 8207.5,-1012.5 C23.2@8208.68,-1013.68 ; C24.2@8112.5,-1002.5 8112.5,-917.5 D6.2@8115,-915 ; D7.1@8340,-740 D7.1@8346.64,-746.64
  Bottom Layer w10: v1(5650,-2665) 5900,-2665 6010,-2775 6007.63,-2775 v1(6007.55,-2775.09)
CGND: B2.4 C22.2 E8.2 OP1_d1.2 OP1_d2.2 OP1_d3.2 OP1_d4.2 OP1_d5.2 P2.8 Q5.2 Q6.3 Q9_a1.2 Q9_a2.2 Q10_a1.2 Q10_a2.2 R51_d1.2 R51_d2.2 R51_d3.2 R51_d4.2 R51_d5.2 R80.2 R85.2 R90_a1.1 R90_a2.1 R95_a1.1 R95_a2.1 | length 24502.6
  Top Layer w30: Q10_a2.2@2035.44,-1179.76 2035.44,-1129.56 2067.43,-1097.57 2210,-1097.57 R95_a2.1@2210,-1160 ; Q9_a1.2@2036,-2193 2036,-2102.57 2053.57,-2085 v2(2205,-2085) ; Q10_a1.2@2036,-1528 2036,-1429 2065,-1400 v2(2205,-1400) ; Q9_a2.2@2040,-1859 Q9_a2.2@2036,-1863 2036,-1774 2060,-1750 v2@2187.43,-1750 ; v2@2202.71,-1397.71 v2(2205,-1400) ; R90_a2.1@2205,-1845 v2@2205,-1767.57 ; R90_a1.1@2207.69,-2162.69 v2@2207.69,-2097.57 ; R95_a1.1@2210,-1505 2207.5,-1502.5 2207.5,-1402.5 v2(2205,-1400) ; Q6.3@2507.14,-3784.46 R85.2@2507.14,-3628.01 ; B2.4@8120,-2438.82 B2.4@8120,-2410
  Top Layer w35: P2.8@280,-750 275,-745 275,-620 ; OP1_d5.2@660,-620 275,-620 ; R51_d5.2@930,-620 930,-560 690,-320 690,-100 ; OP1_d4.2@1130,-602.81 1130,-385.14 995,-250.14 995,-100 ; R51_d4.2@1420,-605 1420,-525 1305,-410 1305,-100 ; v2@1535,-2840 v2(1540,-2845) R80.2@1600,-2845 1600.5,-2845.5 1600.5,-2925.56 Q5.2@1601,-2926.06 ; OP1_d3.2@1651.21,-607.06 1651.21,-100 ; R51_d3.2@1920,-605 1925,-605 1925,-100 ; v2(2175,-610) 2176.47,-608.53 2249.14,-608.53 OP1_d2.2@2250.61,-607.06 2250.61,-100 ; R90_a1.1@2207.69,-2162.69 R90_a1.1@2210,-2165 ; R51_d2.2@2545,-610 2545,-410 2475,-340 2475,-100 ; OP1_d1.2@2850,-607.06 2850,-500 2790,-440 2790,-100 ; R51_d1.2@3132.44,-610 3132.44,-182.44 3050,-100 2790,-100 ; C22.2@7170,-1920 7485,-1920 E8.2@7620,-2055 ; 275,-620 275,-340 515,-100 690,-100 ; 690,-100 995,-100 ; 995,-100 1305,-100 ; 1305,-100 1651.21,-100 ; 1651.21,-100 1925,-100 ; 1925,-100 2250.61,-100 ; 2250.61,-100 2475,-100 ; 2475,-100 2790,-100
  Bottom Layer w30: v2(2205,-2085) v2(2205,-1745) v2(2205,-1400) 2205,-1183 2210,-1178 v2(2210,-1098)
  Bottom Layer w35: v2(2175,-610) 2210,-645 v2(2210,-1098) ; v2(2205,-2085) 2205,-2170 1547.5,-2827.5 1547.5,-2833.44 1540,-2840.94 1540,-3015 1680,-3155 1990,-3155 2507.14,-3672.14 Q6.3@2507.14,-3784.46 2501.79,-3789.82 2501.79,-3809.61 2495,-3816.4 2495,-4730 2580,-4815 5850,-4815 6045,-4620 6045,-4000 6285,-3760 8235,-3760 8335,-3660 8335,-2653.82 B2.4@8120,-2438.82 7736.18,-2055 E8.2@7620,-2055
CLK: *1.52 R47.1 U3.6 | length 1495
  Top Layer w10: *1.52@5061.54,-1957.76 5061.54,-1801.54 5178.07,-1685 5465,-1685 v1(5790,-1360) ; R47.1@5515,-1190 5535,-1210 U3.6@5644.61,-1210 v1(5715,-1210)
  Bottom Layer w10: v1(5715,-1210) 5780,-1210 5790,-1220 v1(5790,-1360)
COMA: K1_a1.2 K1_a2.2 P2.1 R87_a1.2 R87_a2.2 | length 2294.1
  Top Layer w60: P2.1@285.26,-2845 647.64,-2845 1025.01,-2845 R87_a1.2@1215.29,-2654.72 1215.29,-2315.29 1150,-2250 1150,-2238.13 K1_a2.2@1150,-1901.88
  Top Layer w80: P2.1@280,-2850 P2.1@285,-2845 ; P2.1@280,-2849.8 302.99,-2826.81 303.19,-2826.81 595.59,-2534.41 R87_a2.2@647.64,-2534.41
COMB: K2_a1.2 K2_a2.2 P2.4 R92_a1.2 R92_a2.2 | length 2083.9
  Top Layer w60: P2.4@275.3,-1945.3 353.52,-2023.52 R92_a1.2@647.64,-2023.52 651.23,-2019.94 651.23,-1983.77 845,-1790 855,-1790 1085,-1560 K2_a1.2@1150,-1560 K2_a2.2@1150,-1220 1004.81,-1365.19 795.09,-1365.19 R92_a2.2@647.64,-1512.64
CONA1: K1_a1.3 P2.2 R87_a1.1 | length 1098.5
  Top Layer w60: P2.2@285,-2555 440,-2400 714.41,-2400 K1_a1.3@874.41,-2240 980,-2345.59 980,-2484.93 920,-2544.93 R87_a1.1@920,-2550
CONA2: K1_a2.3 P2.3 R87_a2.1 | length 884.8
  Top Layer w60: P2.3@270,-2270 300.88,-2239.12 R87_a2.1@752.36,-2239.12 752.36,-2152.64 874.41,-2030.59 K1_a2.3@874.41,-1900
CONB1: K2_a1.3 P2.5 R92_a1.1 | length 767.2
  Top Layer w60: P2.5@280,-1650 280,-1660.1 348.14,-1728.24 R92_a1.1@752.36,-1728.24 752.36,-1617.64 810,-1560 K2_a1.3@874.41,-1560
CONB2: K2_a2.3 P2.6 R92_a2.1 | length 646.7
  Top Layer w60: P2.6@280,-1350 619.72,-1350 R92_a2.1@752.36,-1217.36 ; R92_a2.1@755,-1220 K2_a2.3@874.41,-1220
CONNE: *1.81 D8.2 | length 675.6
  Top Layer w10: D8.2@4127.5,-1657 4127.5,-1767.5 4477.2,-2117.2 *1.81@4547.76,-2117.2
CPU_RUN: *1.82 D9.2 | length 761.4
  Top Layer w10: D9.2@4025,-1657 4025,-1725 4436.89,-2136.89 *1.82@4547.76,-2136.89
CS: *1.51 R43.1 U3.1 | length 1332.8
  Top Layer w10: *1.51@5081.22,-1957.76 5081.22,-1807.31 5173.53,-1715 5475,-1715 5880,-1310 U3.1@5925.39,-1310 ; U3.1@5925.26,-1310 6012.44,-1310 6042.44,-1340 R43.1@6045,-1340
CTRL_DRLOCK: *1.40 IC12.2 | length 3128.9
  Top Layer w10: IC12.2@3200,-2400 3200,-2380 3200,-2315 3189.14,-2304.14 3095.86,-2304.14 3065,-2335 3065,-2540 3330,-2805 v1(4655,-2805) ; *1.40@5142.24,-2215.63 5250.63,-2215.63 v1(5270,-2235)
  Bottom Layer w10: v1(4655,-2805) 5225,-2235 v1(5270,-2235)
CTRL_FMQ: *1.41 R8.2 | length 2629.3
  Top Layer w10: R8.2@3340,-2940 3340,-2875 3375,-2840 v1(4460,-2840) ; *1.41@5142.24,-2195.94 5142.59,-2195.6 5309.4,-2195.6 v1(5310,-2195)
  Bottom Layer w10: v1(4460,-2840) 4460,-2593.28 4858.28,-2195 v1(5310,-2195)
CTRL_FS: *1.3 IC12.1 | length 1859.8
  Top Layer w10: IC12.1@3150,-2400 3150,-2540 3325,-2715 4625,-2715 4648.15,-2691.85 *1.3@4648.15,-2552.24
CTRL_RelayA1: *1.97 IC12.7 | length 1216.6
  Top Layer w10: IC12.7@3450,-2400 3450,-2340 3475,-2315 4015,-2315 4132.17,-2432.17 *1.97@4547.76,-2432.17
CTRL_RelayA2: *1.98 IC12.6 | length 1246.7
  Top Layer w10: IC12.6@3400,-2400 3400,-2470 3425.86,-2495.86 3600.99,-2495.86 3645,-2451.85 *1.98@4547.76,-2451.85
CTRL_RelayB1: *1.1 IC12.5 | length 1523.5
  Top Layer w10: IC12.5@3350,-2400 3350,-2510 3495,-2655 4595,-2655 4608.19,-2641.81 4608.19,-2552.83 *1.1@4608.78,-2552.24
CTRL_RelayB2: *1.2 IC12.4 | length 1652.2
  Top Layer w10: IC12.4@3300,-2400 3300,-2555 3425,-2680 4610,-2680 4628.46,-2661.54 *1.2@4628.46,-2552.24
CTRL_YSJ: *1.5 IC12.3 | length 1875.3
  Top Layer w10: IC12.3@3250,-2368.21 IC12.3@3250,-2400 3250,-2565 v1(3300,-2615) ; v1(3698.25,-2743.25) 4646.75,-2743.25 4687.52,-2702.48 *1.5@4687.52,-2552.24
  Bottom Layer w10: v1(3300,-2615) 3428.25,-2743.25 v1(3698.25,-2743.25)
DGND: 1.4 2.1 *1.10 *1.27 *1.49 *1.74 *1.99 C1.1 C2.1 C3.2 C4.2 C5.1 C14.2 C19.2 C27.1 C38.1 C40.1 C42.2 CR1.2 E4.2 IC5.1 IC8.1 IC8.4 IC11.3 IC12.8 L2.1 OP1_d1.3 OP1_d2.3 OP1_d3.3 OP1_d4.3 OP1_d5.3 P3.1 P4.10 P4.15 Q1_c1.2 Q1_c2.2 Q1_c3.2 Q2.2 R3.1 R32.1 U1.15 U2.5 U3.4 | length 1266.3
  Top Layer w10: v1(2790,-865) 2792.03,-862.97 OP1_d1.3@2850,-862.97 ; Q2.2@3599.78,-940.23 3649.77,-940.23 v1(3665,-925) ; C27.1@3700,-1400 v1(3700,-1325) ; v1(4080,-2190) R3.1@4146.36,-2256.36 ; R32.1@4190,-685 4190,-680 4193.21,-683.21 v1(4256.24,-683.21) ; v1(4270,-830) IC11.3@4270,-780 ; v1(4412.5,-2484.78) 4415.22,-2484.78 4428.46,-2471.54 4519.22,-2471.54 4520,-2472.31 4520.78,-2471.54 *1.99@4547.76,-2471.54 ; *1.74@4628.46,-1957.76 4628.46,-1898.79 4639.83,-1887.42 v1(4639.83,-1850.42) ; v1(4760,-2485) 4785.6,-2510.6 4785.6,-2551.9 *1.10@4785.94,-2552.24 ; v1(4900,-3025) 4930,-3055 C5.1@4965,-3055 C5.1@4965,-3052.44 ; C2.1@5000,-3290 5001.82,-3291.82 v1(5001.82,-3384.81) ; *1.27@5142.24,-2471.54 5142.59,-2471.19 5268.81,-2471.19 v1(5270,-2470) ; *1.49@5142.24,-2038.46 5169.22,-2038.46 5170,-2037.68 5170.78,-2038.46 5216.54,-2038.46 v1(5310,-1945)
DI: *1.53 R42.1 U3.2 | length 1387.1
  Top Layer w10: *1.53@5041.85,-1957.76 5041.85,-1795.77 5182.62,-1655 5450,-1655 5845,-1260 5925.39,-1260 R42.1@6045,-1260
DO: *1.54 R46.2 U3.5 | length 1481.3
  Top Layer w10: *1.54@5022.17,-1957.76 5022.17,-1789.99 5212.16,-1600 5445,-1600 5753,-1292 5753,-1188 5725,-1160 U3.5@5644.61,-1160 5572.56,-1160 5517.56,-1105 R46.2@5515,-1105
DRLOCK: C51.2 D16.1 D23.2 P6.1 Q6.2 | length 837.7
  Top Layer w30: D23.2@2625,-4218 D16.1@2625,-4104.85 2625.87,-4103.98 2625.87,-3974.91 C51.2@2626.74,-3974.03 2626.74,-3807.99 2618.46,-3799.71 2618.46,-3796.64 Q6.2@2626.74,-3788.36 ; D23.2@2627,-4220 2627,-4227 2630,-4230 2627,-4230 2627,-4612 P6.1@2630,-4615
EE_WP: *1.95 IC8.7 R11.2 | length 1914.1
  Top Layer w10: R11.2@3615,-1510 3555,-1510 3520,-1545 IC8.7@3460,-1545 3380,-1545 3335,-1590 3335,-1685 3450,-1800 3565,-1800 4157.8,-2392.8 *1.95@4547.76,-2392.8
EGND: C15.2 C20.1 | length 312.1
  Top Layer w30: C15.2@7590,-4775 7594.78,-4770.22 7594.78,-4746.57 7595,-4746.36 C20.1@7595,-4465
Error_LED: *1.59 D10.2 | length 950.8
  Top Layer w10: D10.2@4230,-1657 4230,-1724.14 v1(4255.43,-1749.57) ; v1(4900,-1775) 4923.74,-1798.74 *1.59@4923.74,-1957.76
  Bottom Layer w10: v1(4255.43,-1749.57) 4280.86,-1775 v1(4900,-1775)
EXT_RXD2: 2.3 U1.8 | length 1092.7
  Top Layer w10: U1.8@4650,-840 4650,-905 4630,-925 4565,-925 4520,-880 4520,-680 4675,-525 4675,-270 4715,-230 2.3@4855,-230
EXT_RXD3: 1.3 U1.13 | length 1224.4
  Top Layer w10: U1.13@4850,-1060 4850,-985 4870,-965 5165,-965 5290,-840 5290,-325 1.3@5385,-230
EXT_TXD2: 2.4 U1.7 | length 1403.9
  Top Layer w10: U1.7@4700,-840 4705,-840 4700,-845 4700,-925 4665,-960 4520,-960 4475,-915 4475,-595 4560,-510 4560,-235 4665,-130 2.4@4855,-130
EXT_TXD3: 1.2 U1.14 | length 1099.1
  Top Layer w10: U1.14@4900,-1060 4900,-1000 4915,-985 5195,-985 5310,-870 5310,-415 1.2@5395,-330
FS: D3.2 IC2.2 IC12.16 | length 2697.3
  Top Layer w10: D3.2@1700,-3482 1700,-3530 IC2.2@1760,-3590 1870,-3700 2095,-3700 2975,-2820 2975,-2155 3030,-2100 3144.14,-2100 3150,-2105.86 IC12.16@3150,-2180
GS_ADC: *1.30 C32.1 E11.1 R19.2 R52.2 | length 2797.8
  Top Layer w10: E11.1@3400.63,-3525 3400.63,-3740.63 3427.44,-3767.44 3427.44,-3770 3447.44,-3790 R52.2@3450,-3790 3454.14,-3794.14 3454.14,-3824.14 3535,-3905 C32.1@3535,-3975 R19.2@3535,-4065 ; v1(4964.1,-2411.8) 4964.78,-2412.48 *1.30@5142.24,-2412.48
  Bottom Layer w10: E11.1@3400.63,-3519.37 3455,-3465 3910.91,-3465 v1(4964.1,-2411.8)
Hum_ADC1: *1.29 C29.1 E10.1 R17.2 R50.2 | length 3478.5
  Top Layer w10: R17.2@2860,-4060 C29.1@2860,-3975 2860,-3920 2892.56,-3887.44 2892.56,-3840 2900,-3832.56 v2(2900,-3530) ; v2(3380,-3325) 3425,-3280 3994.44,-3280 4124.44,-3150 4573.5,-3150 v1(4670,-3005) ; *1.29@5142.24,-2432.17 5142.59,-2431.82 5243.18,-2431.82 v1(5245,-2430)
  Bottom Layer w10: v2(2900,-3530) 3136.61,-3530 3143.13,-3523.48 3143.13,-3517.5 E10.1@3156.99,-3517.5 ; E10.1@3155.63,-3530 3352.98,-3332.65 3372.35,-3332.65 v2(3380,-3325) ; v1(4670,-3005) v1(5245,-2430)
Hum_Sense: P1.8 R18.2 | length 446.8
  Top Layer w20: R18.2@2860,-4230 2860,-4480 2980,-4600 2980,-4610 2985,-4615 P1.8@2995,-4615
IN_L: *.3 P12.1 R37.2 R38.1 T2.2 | length 4548.7
  Bottom Layer w70: T2.2@1794,-4175 1794,-4295.29 1955.92,-4457.2 ; P12.1@1980.39,-4605 1980.39,-4470 2085,-4365.39 R38.1@2085,-4250
  Bottom Layer w100: R37.2@1137.36,-3742.36 1017,-3622 382.61,-3622 104.61,-3900 420,-4215.39 420,-4705 505,-4790 1805,-4790 P12.1@1980,-4615
IN_N: C47.1 P5.2 P12.2 | length 1879.6
  Top Layer w70: P5.2@691.32,-4615 861.32,-4785 1510,-4785 P12.2@1680,-4615 1680,-4475 1445,-4240 C47.1@1445,-3985.09
  Bottom Layer w70: P5.2@691.32,-4630.15 P5.2@691.32,-4615 ; C47.1@1445,-3985.09 C47.1@1450.44,-3990.53
Input1: *1.84 OP1_d1.4 R31_d1.2 | length 2509
  Top Layer w10: OP1_d1.4@2950,-862.97 R31_d1.2@2950,-955 2950,-1000 3055,-1105 3840,-1105 3910,-1175 3910,-1665 4421.26,-2176.26 *1.84@4547.76,-2176.26
Input2: *1.85 OP1_d2.4 R31_d2.2 | length 3128.7
  Top Layer w10: OP1_d2.4@2350.61,-862.97 2350.61,-954.79 R31_d2.2@2350.81,-955 2350.81,-1010.81 2385,-1045 2950,-1045 3035,-1130 3820,-1130 3883,-1193 3883,-1693 4385.94,-2195.94 *1.85@4547.76,-2195.94
Input3: *1.88 OP1_d3.4 R31_d3.2 | length 3717.8
  Top Layer w10: R31_d3.2@1751.21,-954.59 OP1_d3.4@1751.21,-862.97 ; R31_d3.2@1751.63,-955 1751.63,-991.63 1775,-1015 2295,-1015 2343,-1063 2928,-1063 3030,-1165 3685,-1165 3780,-1260 3780,-1720 4315.78,-2255.78 4516.17,-2255.78 4516.6,-2255.35 4547.41,-2255.35 *1.88@4547.76,-2255
Input4: *1.57 OP1_d4.4 R31_d4.2 | length 4558.7
  Top Layer w10: OP1_d4.4@1230,-860.91 R31_d4.2@1230,-945 1230,-1005 1265,-1040 2275,-1040 2320,-1085 2905,-1085 3025,-1205 3680,-1205 v1(3710,-1235) ; v1(4705,-1270) 4819,-1384 4879,-1384 4963.11,-1468.11 *1.57@4963.11,-1957.76
  Bottom Layer w10: v1(3710,-1235) 3745,-1270 v1(4705,-1270)
Input5: *1.58 OP1_d5.4 R31_d5.2 | length 5001.1
  Top Layer w10: OP1_d5.4@760,-875.91 R31_d5.2@760,-955 760,-1025 795,-1060 2260,-1060 2305,-1105 2880,-1105 3000,-1225 3643.54,-1225 v1(3693.06,-1274.52) ; v1(4718,-1343) 4797.39,-1422.39 4889.92,-1422.39 4943.43,-1475.9 *1.58@4943.43,-1957.76
  Bottom Layer w10: v1(3693.06,-1274.52) 3738.54,-1320 4695,-1320 v1(4718,-1343)
IO_RESET: *1.66 P11.1 R6.2 | length 1846.8
  Top Layer w10: P11.1@4395,-270 4395,-580.2 4440,-625.2 R6.2@4440,-1075 ; R6.2@4447,-1075 4447,-1152 4785.94,-1490.94 *1.66@4785.94,-1957.76
Ligh_ADC1: *1.15 P4.4 | length 4898.3
  Top Layer w10: *1.15@4884.37,-2552.24 4884.37,-2774.37 5005,-2895 5595,-2895 5805,-2685 5805,-1975 6020,-1760 6260,-1760 6695,-1325 7125,-1325 7270,-1180 v1(7270,-805)
  Bottom Layer w10: v1(7270,-805) 7470,-805 7770,-505 P4.4@7770,-390
Ligh_ADC2: *1.16 P4.6 | length 4897.6
  Top Layer w10: *1.16@4904.06,-2552.24 4904.06,-2754.06 5015,-2865 5590,-2865 5775,-2680 5775,-1955 6010,-1720 6260,-1720 6680,-1300 7089.54,-1300 7230,-1159.54 v1(7230,-840)
  Bottom Layer w10: v1(7230,-840) 7500,-840 7870,-470 P4.6@7870,-390
Ligh_ADC3: *1.17 P4.8 | length 4919.2
  Top Layer w10: *1.17@4923.74,-2552.24 4923.74,-2738.74 5025,-2840 5570,-2840 5735,-2675 5735,-1950 6000,-1685 6255,-1685 6665,-1275 7055,-1275 7200,-1130 v1(7200,-870)
  Bottom Layer w10: v1(7200,-870) 7580,-870 7970,-480 P4.8@7970,-390
Net*1_6: *1.6 CR1.1 | length 1535.3
  Top Layer w10: CR1.1@3490,-2950.31 3565.31,-2875 4645,-2875 4707.2,-2812.8 *1.6@4707.2,-2552.24 ; CR1.1@3502.81,-2953.12 CR1.1@3502.81,-2952.54
Net*1_8: *1.8 C2.2 Y1.1 | length 869.8
  Top Layer w10: *1.8@4746.57,-2552.24 4746.57,-3036.57 4785,-3075 Y1.1@4785,-3289.49
  Top Layer w20: Y1.1@4787.09,-3288.8 4787.78,-3289.49 4889.49,-3289.49 4895,-3295 4898.18,-3291.82 C2.2@4898.18,-3290.19
Net*1_9: *1.9 C1.2 Y1.2 | length 975.8
  Top Layer w10: *1.9@4766.26,-2552.24 4766.26,-2955 4780,-2968.74 v1(4780,-2995)
  Top Layer w20: C1.2@4510,-3325 4510,-3322.44 4525,-3307.44 4527.56,-3307.44 4547.63,-3287.37 Y1.2@4689.6,-3287.37
  Bottom Layer w10: Y1.2@4691.02,-3288.8 4691.02,-3083.98 v1(4780,-2995)
Net*1_12: *1.12 C3.1 R2.1 Y2.1 | length 1483
  Top Layer w10: *1.12@4825.31,-2552.24 4825.31,-3040.31 5082.5,-3297.5 C3.1@5230,-3297.5
  Top Layer w20: C3.1@5230,-3297.5 5457.5,-3297.5 Y2.1@5458.75,-3296.25 ; Y2.1@5460,-3295 Y2.1@5458.75,-3296.25 ; R2.1@5495,-3490 R2.1@5510,-3505 5507.44,-3505 5493.72,-3491.28 5458.75,-3456.31 Y2.1@5458.75,-3296.25